# Altium PCB type-c_拓展板.PcbDoc
Units mil, origin at the board's own origin, x right, y up, seen from the top; angles counter-clockwise.
Board outline 1045 x 1235 mil, 2 copper layers (Top Layer, Bottom Layer); 20 components, 16 nets, 83 pads, 15 vias.
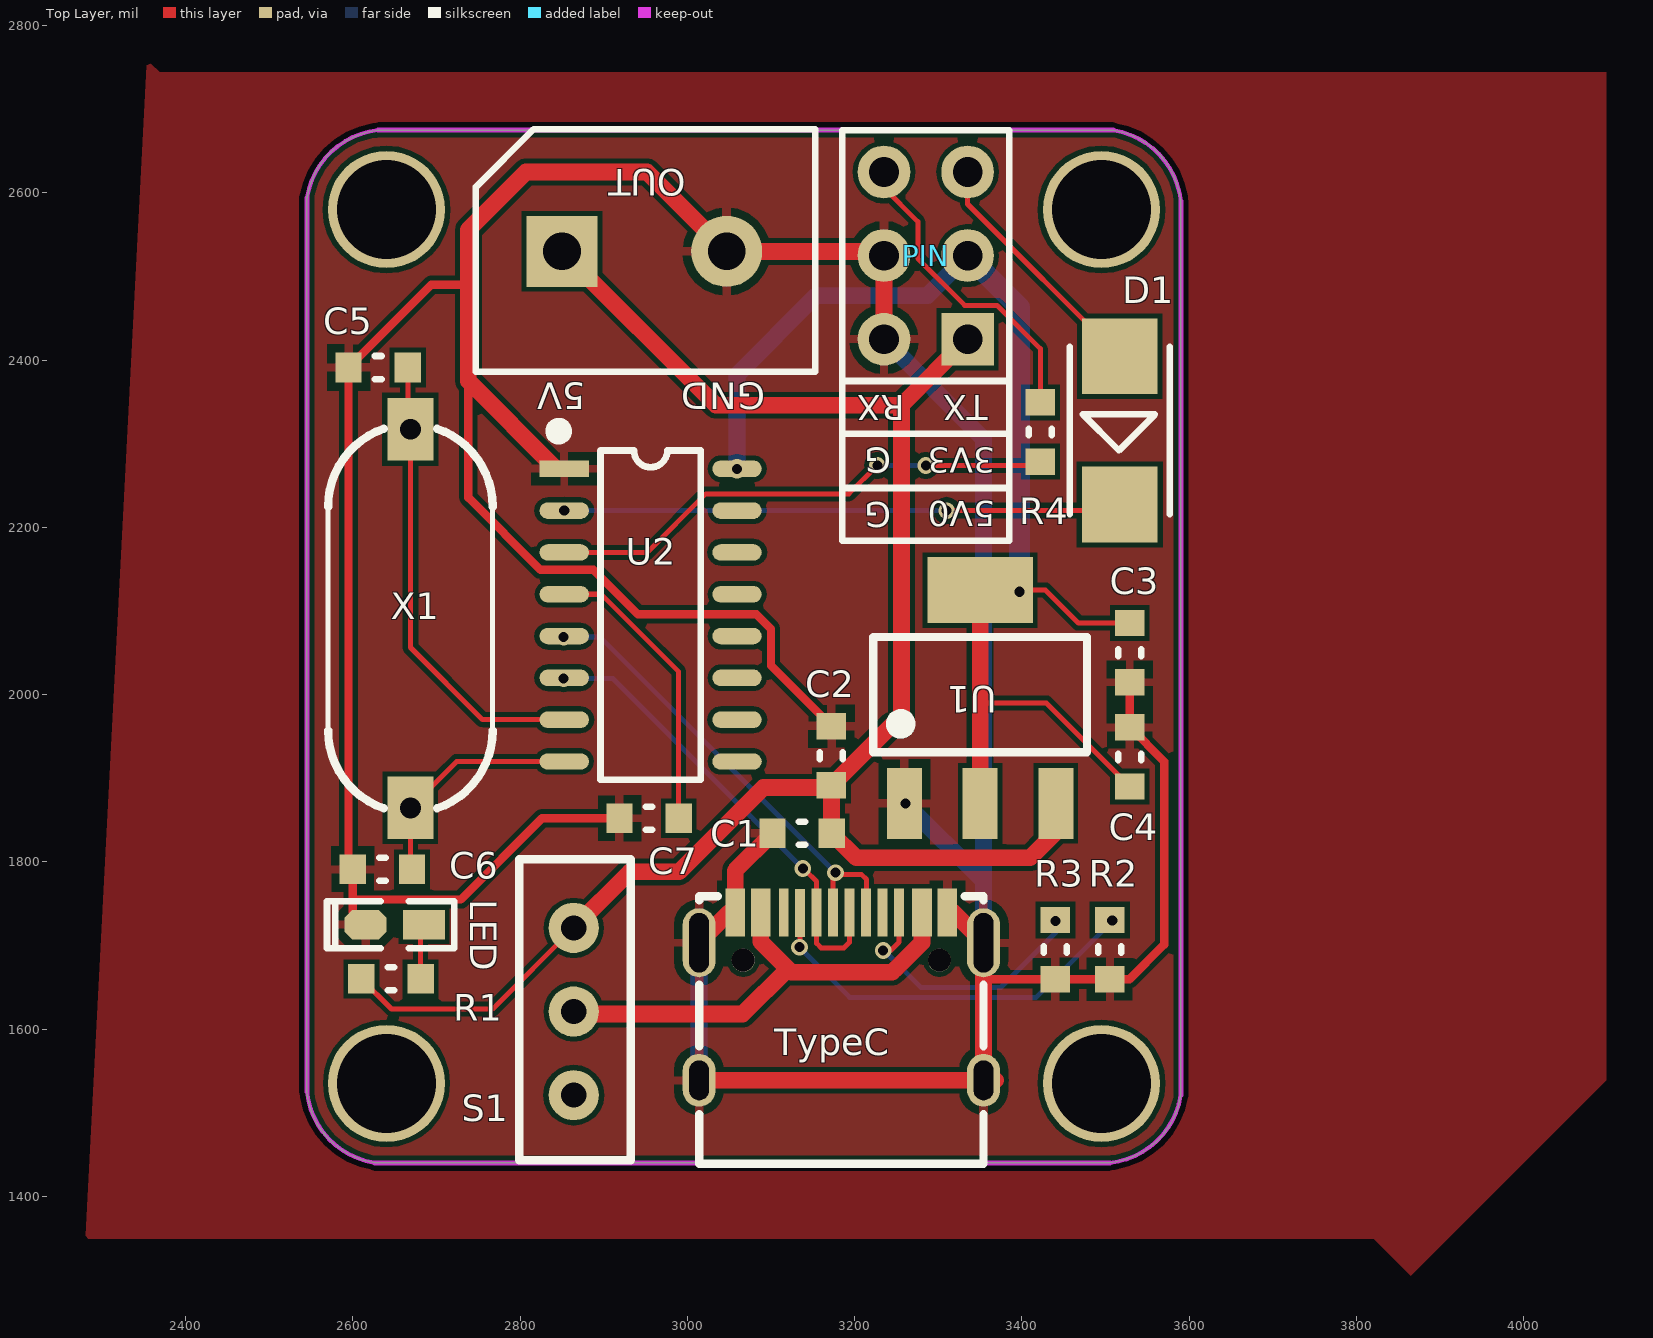
[diagram p0: Top Layer view]
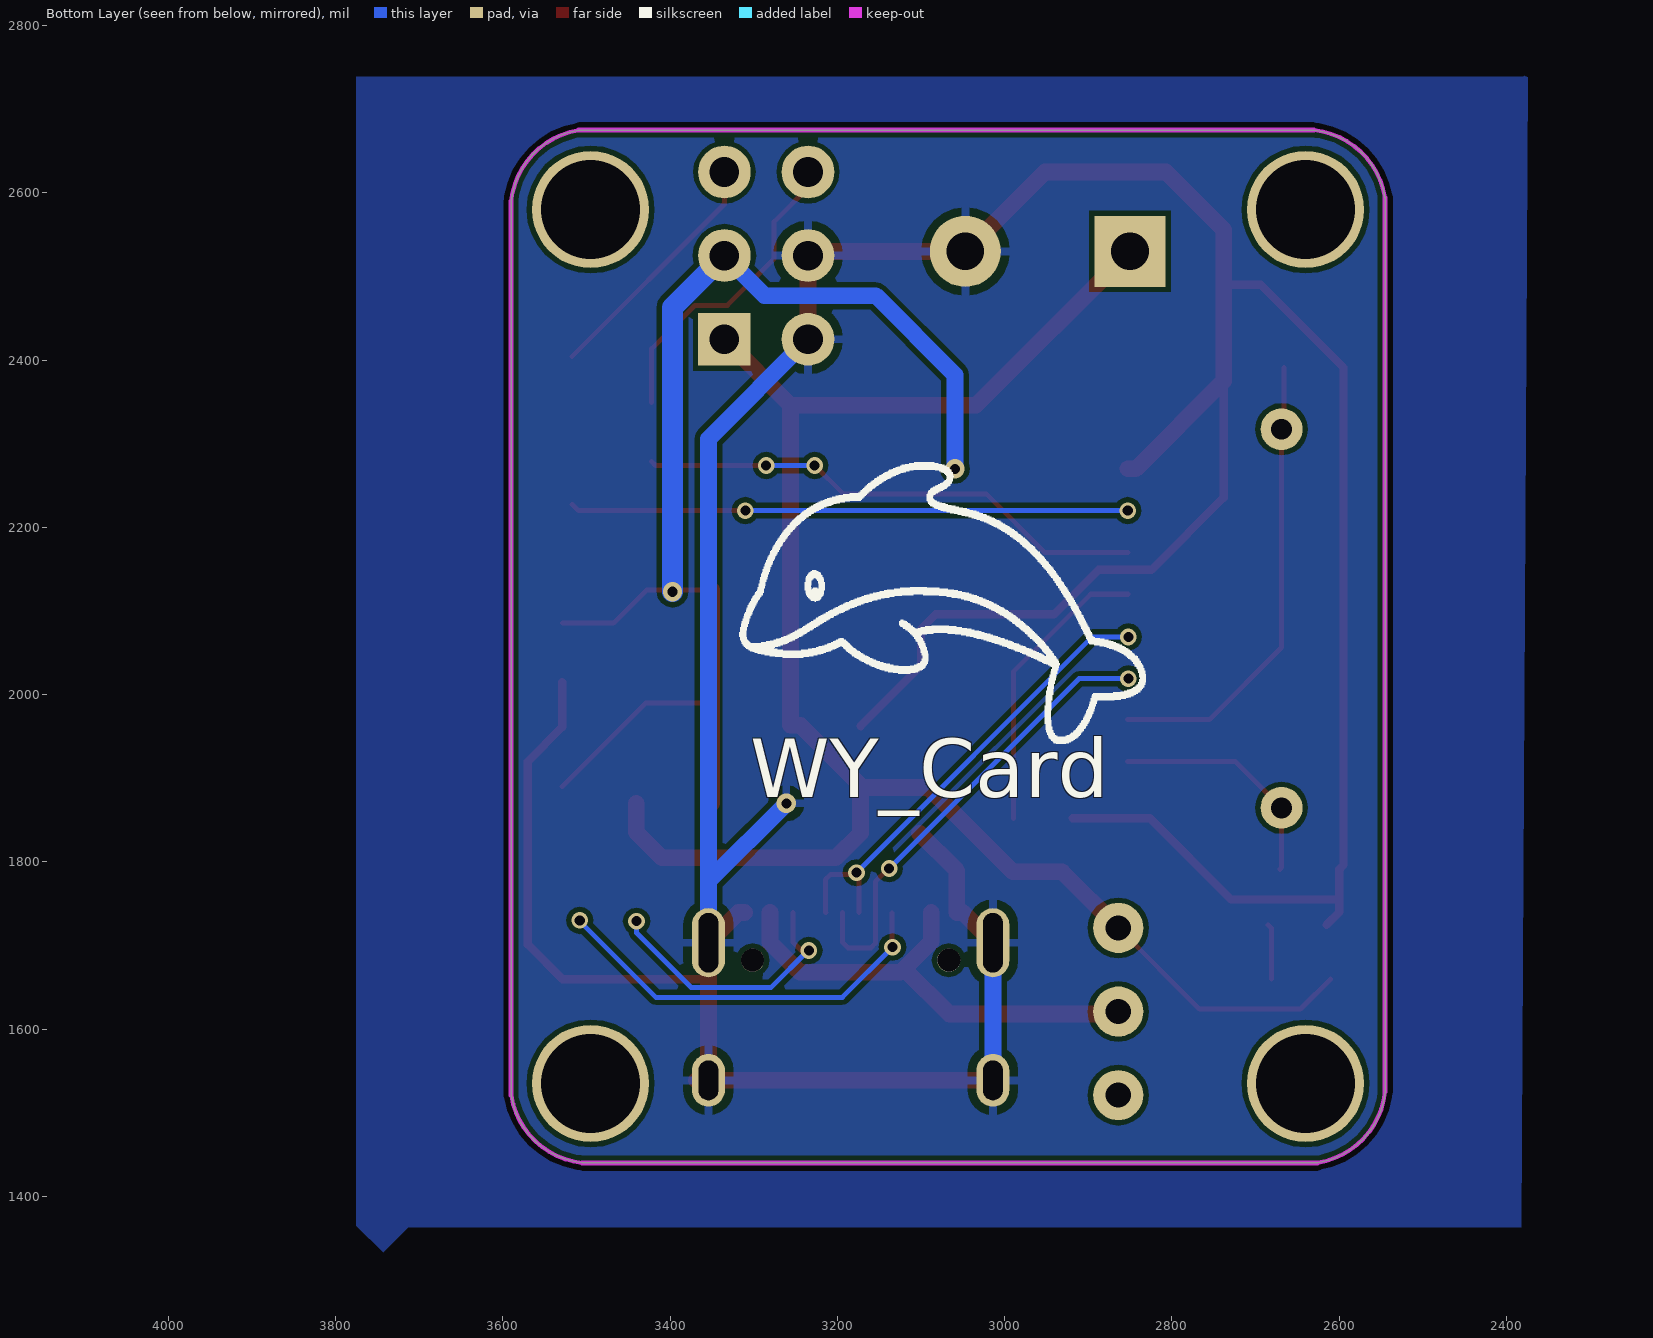
[diagram p1: Bottom Layer view, seen from below]

## Layer stack, top to bottom
Top Solder: solder mask 0.4, Solder Resist, Dk 3.5
Top Layer: signal copper 1.4
Dielectric 1: dielectric 12.6, FR-4, Dk 4.8
Bottom Layer: signal copper 1.4
Bottom Solder: solder mask 0.4, Solder Resist, Dk 3.5

## Board outline
2545,1525 ccw(c2640.52,1535.05) 2625.54,1440.18 2625.54,1440 3505,1440 ccw(c3494.95,1535.52) 3589.82,1520.54 3590,1520.54 3590,2590 ccw(c3494.48,2579.95) 3509.46,2674.82 3509.46,2675 2630,2675 ccw(c2640.05,2579.48) 2545.18,2594.46 2545,2594.46

## Design rules (kind name [scope] priority, off if disabled: settings)
Clearance [All] p1: gap=6
PolygonConnect [All] p1: connectstyle=Relief reliefconductorwidth=10 reliefentries=4 polygonreliefangle="90 Angle" airgapwidth=10
RoutingVias [All] p1: holewidth=28 width=50 viastyle="Through Hole" minholewidth=28 minwidth=50 maxholewidth=28 maxwidth=50
SolderMaskExpansion [All] p1: expansion=4
Width [All] p1: maxlimit=50 minlimit=6 preferedwidth=10 minimp=50.000000 maximp=50.000000 favimp=50.000000
30 further rules are at their usual default settings.

## Components (designator, comment, footprint, x,y, rotation, side; value= is the part's Value field where it differs from the comment)
C1 "10uF" C0603 3137,1833 r0 top
C2 "100nF" C0603 3171,1927 r270 top
C3 "10uF" C0603 3530,2050 r90 top
C4 "100nF" C0603 3527.87,1925.7 r270 top
C5 "22pf" C0603 2630,2390 r0 top
C6 "22pF" C0603 2635,1790 r0 top
C7 "100nF" C0603 2954,1851 r0 top
D1 "1n4147" DIODE-SMA 3517,2316 r270 top
LED "LED" "LED 0603R" 2650,1725 r180 top (schematic designator PWR?)
OUT "POVER_OUT" P 3038,2508 r180 top
PIN "PIN" HDR2.54-LI-2x3P 3285,2525 r90 top
R1 "2K" R0603 2645.43,1660 r0 top
R2 "5.1K" R0603 3505,1695 r90 top
R3 "5.1K" R0603 3440,1695 r90 top
R4 "300R" R0603 3422,2314 r90 top
S1 "SW-SPDT" S 2864,1621 r270 top
TypeC "TYPEC-304-BCP16" USB-C-SMD_TYPEC-304-BCP16 3184,1639 r0 top
U1 "AMS1117-3.3" AMS1117 3350,2000 r0 top
U2 "CH340G" SOP16_L 2956,2095 r0 top
X1 "12M" XTAL 2650,2130 r90 top

## Footprints (in the part's own frame and the unit in brackets; to place one, negate y for a bottom-side part, rotate by r counter-clockwise, add the part's x,y. Pads: shape width x height; smd on the part's side, far side on the other; paste and mask are expansions set on the pad)
AMS1117 [mil] "6.4x7x1.6mm(长宽高)"
  rect 42x85 smd: 1(-90.55,-130) 2(0,-130) 3(90.55,-130)
  rect 125.98x78.74 smd: 2(0,125)
  silkscreen extent -128,-69 128,69, body extent -128,-138 128,138, height 65
C0603 [mm]
  rect 0.8x0.9 smd: 1(-0.897,0.029) 2(0.903,0.029)
  silkscreen extent -0.1,-0.32 0.1,0.38, body extent -0.8,-0.38 0.8,0.42, height 0.9
DIODE-SMA [mm] "贴片二极管"
  rect 2.3x2.3 smd: 1(-2.25,0) 2(2.25,0)
  silkscreen extent -2.54,-1.52 2.54,1.52, body extent -2.92,-1.4 2.92,1.4, height 3
HDR2.54-LI-2x3P [mm] "双排排针，3x2脚"
  rect 1.6x1.6 hole 0.9: 1(-2.54,-1.27)
  round 1.6 hole 0.9: 2(-2.54,1.27) 3(0,-1.27) 4(0,1.27) 5(2.54,-1.27) 6(2.54,1.27)
  silkscreen extent -3.81,-2.54 3.81,2.54, body extent -3.81,-2.54 3.81,2.54, height 8.5
"LED 0603R" [mil] "红色0603LED"
  rect 50x35 smd: 1(-35,0.26)
  oct 50x35 smd: 2(35,0.26)
  silkscreen extent -71,-28 81,28, body extent -31,-16 32,16, height 24
P [mil]
  rect 85x85 hole 45: 1(188,-22)
  round 85 hole 45: 2(-8.85,-22)
  silkscreen extent -115,-168 291,122, body extent -119,-172 294,127, height 396
R0603 [mm] "0603的电阻封装"
  rect 0.8x0.9 smd: 1(-0.9,0) 2(0.9,0)
  silkscreen extent -0.1,-0.35 0.1,0.35, body extent -0.8,-0.4 0.8,0.4, height 0.45
S [mil] "脚距3mm"
  round 60 hole 30: 1(-100,0) 2(0,0) 3(100,0)
  silkscreen extent -182,-65 178,68
SOP16_L [mm] "10.3*6.2*1.8mm（长宽高）"
  rect 1.5x0.5 smd: 1(-2.625,4.445)
  oval 1.5x0.5 smd: 2(-2.625,3.175) 3(-2.625,1.905) 4(-2.625,0.635) 5(-2.625,-0.635) 6(-2.625,-1.905) 7(-2.625,-3.175) 8(-2.625,-4.445) 9(2.625,-4.445) 10(2.625,-3.175) 11(2.625,-1.905) 12(2.625,-0.635) 13(2.625,0.635) 14(2.625,1.905) 15(2.625,3.175) 16(2.625,4.445)
  silkscreen extent -2.95,-5 1.52,5.74, body extent -3,-5 3,5, height 1.9
USB-C-SMD_TYPEC-304-BCP16 [mm]
  oval 1x2.1 hole 0.6 slot 1.8 at 90 deg: 13(-4.32,1.633) 14(4.32,1.633)
  oval 1x1.6 hole 0.6 slot 1.2 at 90 deg: 15(-4.32,-2.547) 16(4.32,-2.547)
  rect 0.6x1.45 smd: A1B12(-3.225,2.547) A4B9(-2.45,2.547) B1A12(3.22,2.547) B4A9(2.45,2.547)
  rect 0.3x1.45 smd: A5(-1.26,2.532) A6(-0.25,2.547) A7(0.25,2.547) A8(1.25,2.547) B5(1.75,2.547) B6(0.75,2.547) B7(-0.75,2.547) B8(-1.75,2.547)
  round 0.7 hole 0.7 unplated: ""(-2.98,1.102) ""(2.98,1.102)
  silkscreen extent -4.32,-5.08 4.32,3.05, body extent -4.42,-4.9 4.52,3, height 3.11
XTAL [mil] "贴片晶振封装"
  rect 75x55 smd: 1(-265.4,-18.7) 2(187.36,-18.7)
  silkscreen extent -266,-117 188,80, body extent -280,-112 205,78, height 170

## Part data
C1 C2 C3 C4 C5 C6 C7: library part Cap, "贴片电容"
D1: library part D, "二极管"
OUT: library part POVER_IN
R1 R2 R3 R4: library part R
S1: "开关"
U1: library part AMS1117
U2: "串口转USB"
X1: library part XTAL

## Free pads (board coordinates)
  round 140 hole 118.11: 5(2640,1535) 5(2640,2580) 5(3495,1535) 5(3495,2580)
  round 50 hole 25: 6(2668.7,1864.6) 6(2668.7,2317.36)

## Via types
v1: diameter 20, hole 12, Top Layer to Bottom Layer, tented both sides, 12 vias
v2: diameter 23, hole 12, Top Layer to Bottom Layer, tented both sides, 3 vias

## Nets (pads, with @x,y where several pads share a name; then routed paths per layer and width w, separated by ;. In a path a pad name is that pad's centre, name@x,y a point inside that pad or via, vN(x,y) a via of type N, cw(c..) or ccw(c..) an arc to the next point about the centre after c; other vN are vias at no path point)
3V3: C3.2 C4.2 PIN.3 U1.2 U2.16 | length 1545.3
  Top Layer w6: 3350,1990 3429.13,1990 C4.2 ; U1.2@3350,2125 3428,2125 3467.43,2085.57 C3.2
  Top Layer w20: U1.2@3350,1870 3350,1990 U1.2@3350,2125
  Bottom Layer w20: v2(3059.35,2270) 3059.35,2382.35 3154,2477 3287,2477 PIN.3
  Bottom Layer w25: PIN.3 3397,2463 v2(3397,2123)
5V0: C1.2 C2.2 OUT.1 PIN.1 R1.1 S1.1 U1.3 | length 2162.7
  Top Layer w6: R1.1 2646,1624 2767,1624 S1.1
  Top Layer w20: OUT.1 3034,2346 3256,2346 ; S1.1 2931,1788 2990,1788 3091,1889 3169.7,1889 C2.2 ; PIN.1 3256,2346 ; U1.3 3440.55,1835.55 3410,1805 3201.7,1805 C1.2 3172.13,1834.57 C2.2 ; C2.2 3244,1963.3 3256,1963.3 3256,2346
D+: TypeC.A6 TypeC.B6 U2.5 | length 564.7
  Top Layer w6: TypeC.A6 3174.16,1778.15 3181,1785 3208,1785 3214,1779 3214,1739.77 TypeC.B6
  Bottom Layer w6: v1@2853,2069 2895,2069 v1(3177,1787)
  other v1: 2852,2069
D-: TypeC.A7 TypeC.B7 U2.6 | length 553
  Top Layer w6: v1@3141,1790 3154.47,1776.53 TypeC.B7 3154.47,1702.53 3160,1697 3187,1697 3193.84,1703.84 TypeC.A7
  Bottom Layer w6: v1(2852,2019) 2911,2019 v1(3138,1792)
GND: C1.1 C2.1 C3.1 C4.1 C5.1 C6.1 C7.1 LED.2 OUT.2 PIN.2 PIN.4 R2.1 R3.1 TypeC.13 TypeC.14 TypeC.15 TypeC.16 TypeC.A1B12 TypeC.B1A12 U1.1 U2.1 | length 5331.9
  Top Layer w6: C4.1@3528.87,1961.13 C4.1
  Top Layer w10: LED.2 2599.7,1740.03 2599.7,1755 ; 2738,2375 2738,2235.49 2824.34,2149.16 2887.64,2149.16 2940.8,2096 3082.51,2096 3099.87,2078.63 3099.87,2034.56 C2.1 ; 2738,2490 2693.57,2490 C5.1 2594.7,1796.13 C6.1 2599.7,1755 ; C7.1 2826.13,1852.13 2729,1755 2599.7,1755 ; 3354.08,1654 3359.65,1659.57 R3.1 R2.1 3528.57,1659.57 3570,1701 3570,1920 C4.1 ; C4.1@3528.87,1961.13 C3.1
  Top Layer w20: U2.1 2843,2270 2738,2375 2738,2490 2738,2556 2807,2625 2951.85,2625 OUT.2 3230,2530 PIN.4 PIN.2 ; TypeC.15 TypeC.16 3368.3,1538.7 3354.08,1552.92 3354.08,1654 TypeC.14 3318.06,1739.3 TypeC.B1A12 ; TypeC.13 3049.94,1739.3 TypeC.A1B12 3057.03,1789.46 C1.1
  Bottom Layer w20: TypeC.15 TypeC.13 ; PIN.4@3230,2530 PIN.4 ; PIN.2 3354.08,2305.92 3354.08,1776.92 ; v2(3261,1870) 3354.08,1776.92 ; TypeC.14 3354.08,1776.92
NetC5_2: C5.2 pad.6@2668.7,2317.36 U2.7 X1.2 | length 555.8
  Top Layer w6: C5.2 2665.57,2320.49 X1.2 2668.7,2056.3 2755,1970 U2.7
NetC6_2: C6.2 pad.6@2668.7,1864.6 U2.8 X1.1 | length 281.1
  Top Layer w6: C6.2 2668.7,1793 X1.1 2724.1,1920 U2.8
NetC7_2: C7.2 U2.4 | length 350.6
  Top Layer w6: U2.4 2897,2120 2989.57,2027.43 C7.2
NetD1_2: D1.2 U2.2 | length 668.8
  Top Layer w6: v1(3310,2220) 3509.58,2220 D1.2
  Bottom Layer w6: v1(2852.65,2220) v1(3310,2220) v1@3311,2221
NetPWR?_1: LED.1 R1.2 | length 66.5
  Top Layer w6: R1.2 2680.87,1720.61 LED.1
NetR2_2: R2.2 TypeC.A5 | length 479.6
  Top Layer w6: v1@3134.39,1695.61 TypeC.A5
  Bottom Layer w6: v1(3134,1698) 3194,1638 3417,1638 v1@3508,1729
  other v1: 3508,1730
NetR3_2: R3.2 TypeC.B5 | length 323.5
  Top Layer w6: v1(3234,1694) 3243,1694 3252.9,1703.9 TypeC.B5
  Bottom Layer w6: v1(3234,1694) 3235,1694 3279,1650 3375,1650 3440,1715 v1(3440,1729)
NetR4_1: R4.1 U2.3 | length 614.3
  Top Layer w6: U2.3 2951.98,2170 3021.98,2240 3193,2240 v1(3227,2274) ; v1(3285,2274) 3417.43,2274 R4.1
  Bottom Layer w6: v1(3227,2274) v1(3285,2274)
RXD: PIN.6 R4.2 | length 375.7
  Top Layer w6: PIN.6 3235,2606 3275.5,2565.5 3275.5,2521.5 3331.5,2465.5 3370.22,2465.5 3422,2413.72 R4.2
TXD: D1.1 PIN.5 | length 295.8
  Top Layer w6: PIN.5 3335,2586.58 D1.1
VCC: S1.2 TypeC.A4B9 TypeC.B4A9 | length 573.5
  Top Layer w20: S1.2@2865,1625 2872,1618 3066,1618 3120,1672 ; TypeC.A4B9 3087.54,1704.46 3120,1672 ; 3248.77,1672 3244.77,1668 3124,1668 3120,1672 ; 3248.8,1672 3280.45,1703.65 TypeC.B4A9
pads on no net: S1.3 TypeC. TypeC.A8 TypeC.B8 U2.9 U2.10 U2.11 U2.12 U2.13 U2.14 U2.15

## Polygon pours and split planes (outlines as drawn)
GND on Bottom Layer "GND" (solid, pour order 4): 2374,2745 2380,2739 3775,2739 3775,1365 3743,1333 3713,1363 2382,1363
GND on Top Layer "GND" (solid, pour order 8): 2354,2759 2369,2744 4099,2744 4099,1539 3865,1305 3821,1349 2280,1349

## Keep-outs
Keep-Out Layer:
  lines w5: 2545,1525 ccw(c2640.52,1535.05) 2625.54,1440.18 ; 2545.18,2594.46 cw(c2640.05,2579.48) 2630,2675 ; 3505,1440 ccw(c3494.95,1535.52) 3589.82,1520.54 ; 3509.46,2674.82 cw(c3494.48,2579.95) 3590,2590
  lines w6: 2545,1525 2545,2594.46 ; 2625.54,1440 3505,1440 ; 2630,2675 3509.46,2675 ; 3590,1520.54 3590,2590

## Silkscreen, mask and mechanical layers (free items; w line width, h text height)
Top Overlay:
  lines w8: 3185,2247 3385,2247 ; 3185,2312 3385,2312 ; 3185,2375 3185,2184 3385,2184 3385,2375
  text "RX" at 3260,2358 h30 r180
  text "TX" at 3359,2358 h30 r180
  text "G" at 3244,2295 h30 r180
  text "3V3" at 3368,2295 h30 r180
  text "5V0" at 3368,2231 h30 r180
  text "G" at 3244,2230 h30 r180
Bottom Overlay:
  drawing of 988 lines, arcs and shapes, not listed
  text "WY_Card" at 3304,1854 h120

## Text inside footprints (layer, text, board x,y; h text height)
OUT: Top Overlay "GND" at 3093,2373 h32 r180; Top Overlay "5V" at 2878,2373 h32 r180